# Altium PCB SEC(70x35mm).PcbDoc (part 1 of 2)
Units mil, origin at the board's own origin, x right, y up, seen from the top; angles counter-clockwise.
Board outline 2767.39 x 1392.75 mil, 4 copper layers (Top Layer, GND, POWER, Bottom Layer), stack 25.134 mil thick; 146 components, 106 nets, 504 pads, 259 vias.
Unrouted connection lines stored in the file: 8.
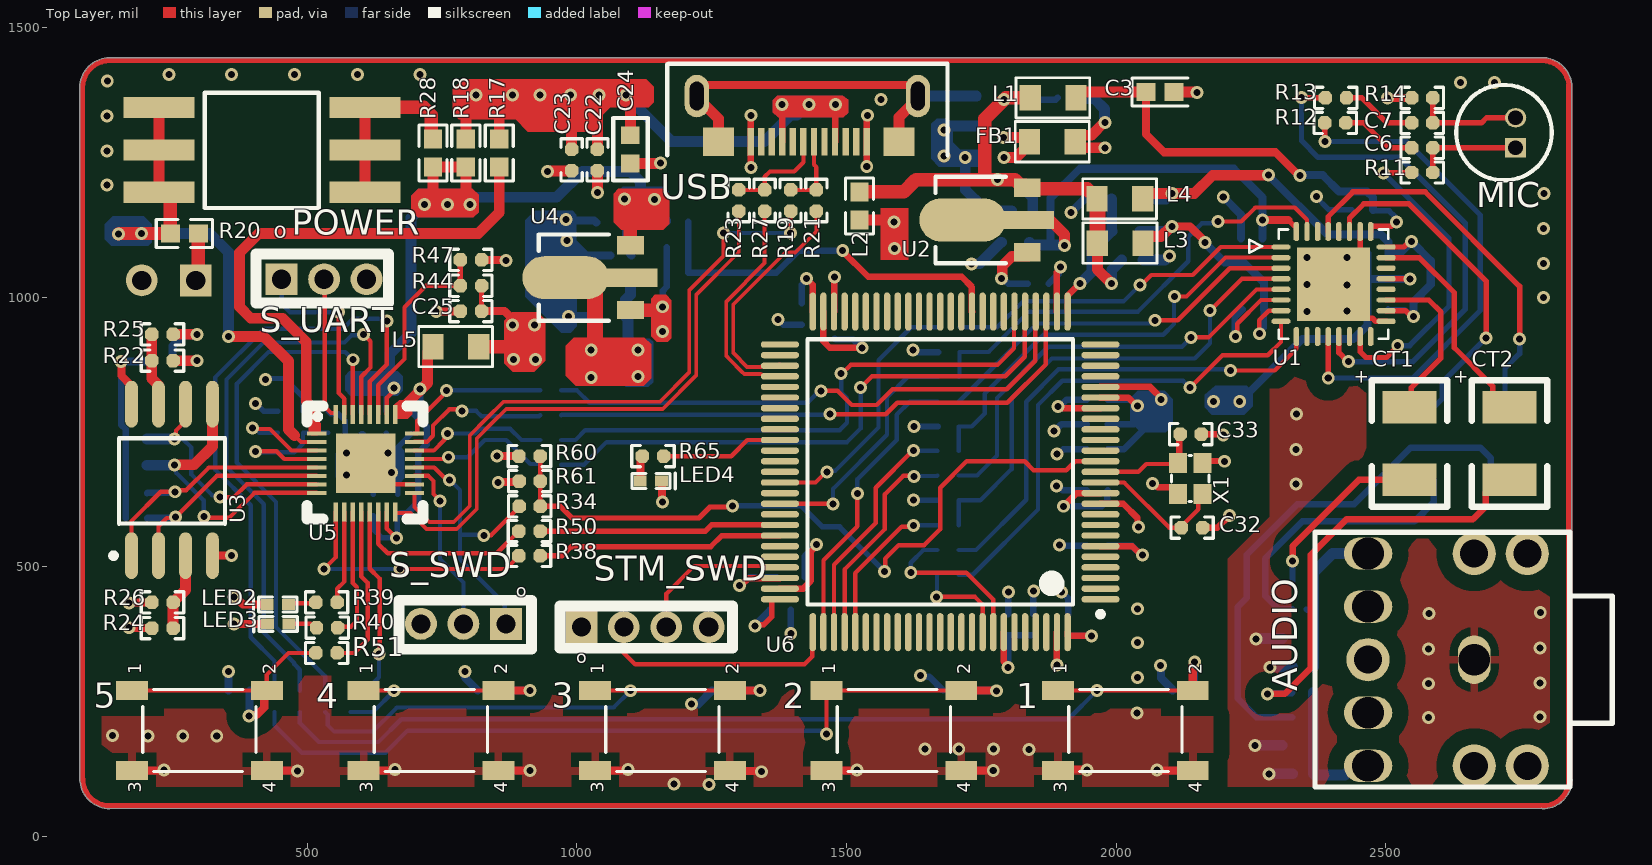
[diagram p0: Top Layer view]
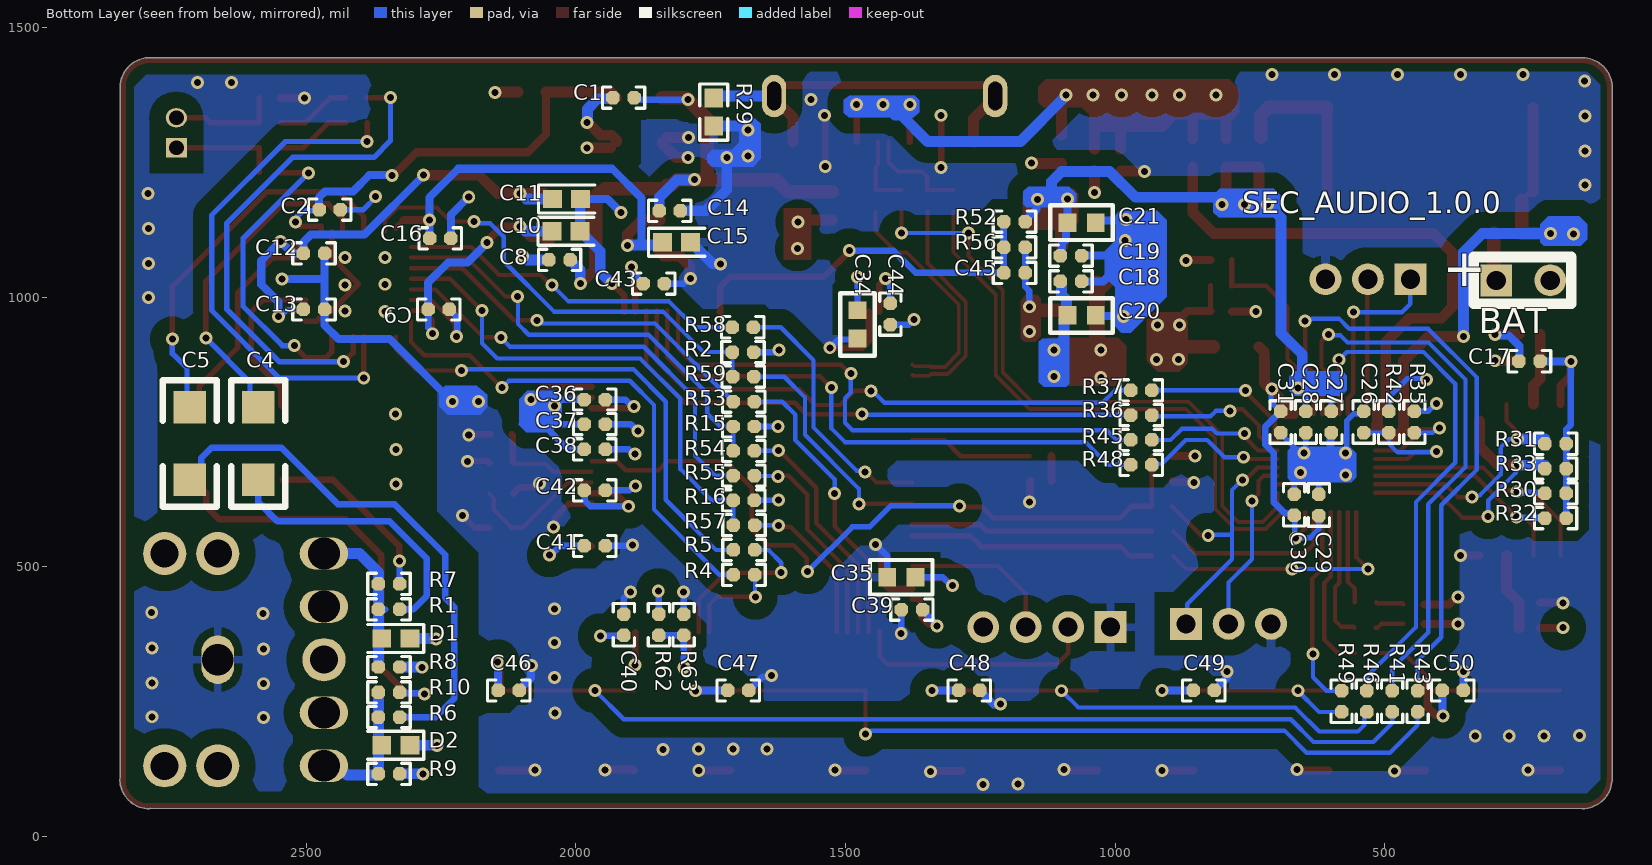
[diagram p1: Bottom Layer view, seen from below]
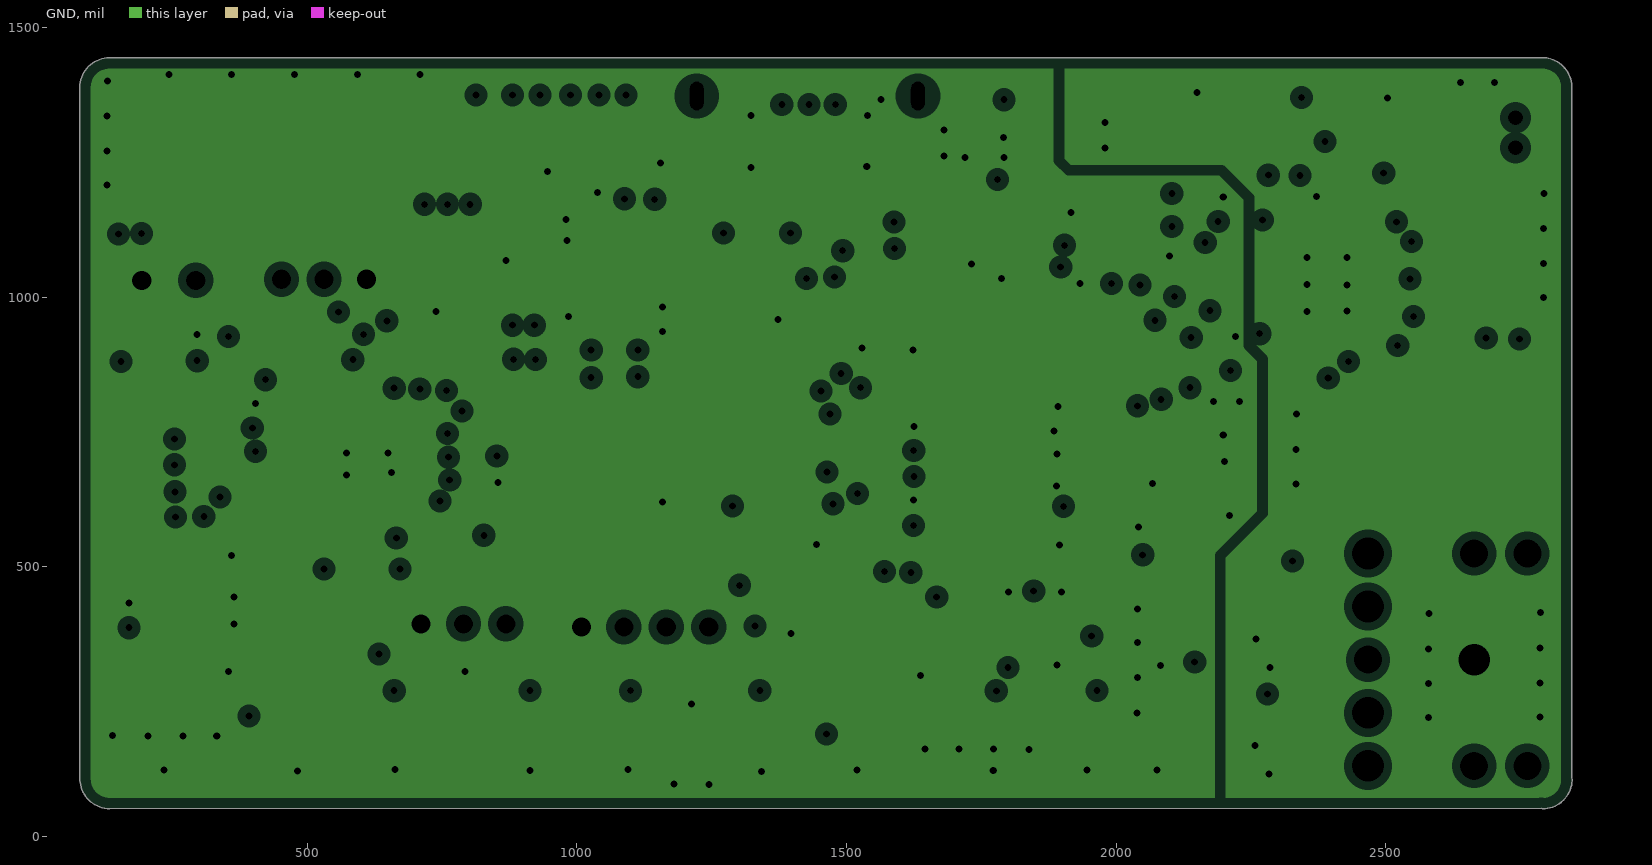
[diagram p2: GND, clearances drawn from the general rule]
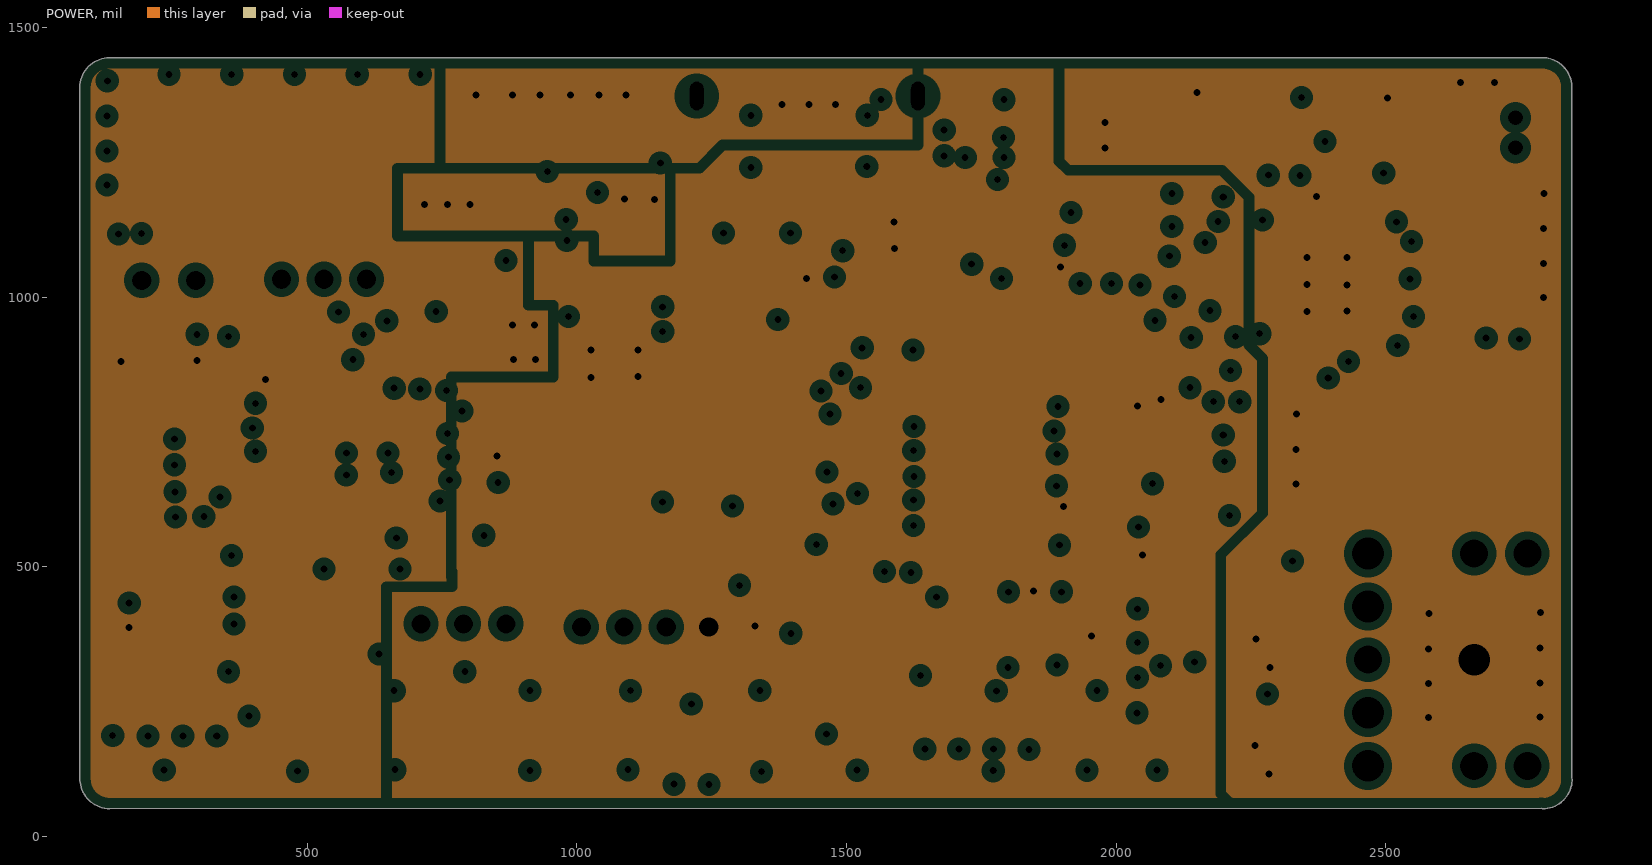
[diagram p3: POWER, clearances drawn from the general rule]

## Layer stack, top to bottom
Top Solder: solder mask 0.4, Solder Resist, Dk 3.5
Top Layer: signal copper 1.4
Dielectric 1: core 4.5, FR-4, Dk 4.5
GND: plane copper 1.417, net (Multiple Nets)
Dielectric2: prepreg 5, FR-4, Dk 4.2
POWER: plane copper 1.417, net (Multiple Nets)
Dielectric3: core 10, FR-4, Dk 4.2
Bottom Layer: signal copper 1.4
Bottom Solder: solder mask 0.4, Solder Resist, Dk 3.5

## Board outline
133.35,51.37 cw(c133.35,106.39) 78.68,100.22 78,102.74 78,1388.74 cw(c133.02,1388.74) 133.02,1443.75 2798.02,1443.75 2801.21,1442.6 cw(c2790.02,1388.74) 2844.57,1395.83 2845.03,1393.74 2845.03,1388.7 2845.03,107.89 2845.39,106.02 cw(c2790.38,106.02) 2845.03,99.7 2844.31,95.15 cw(c2790.38,106.02) 2790.38,51 2787.79,51.72

## Design rules (kind name [scope] priority, off if disabled: settings)
Clearance Clearance_GND_EARTH [InNet('GND_EARTH') vs InNet('GND')] p1: gap=30 ignorepadtopadclearanceinfootprint=FALSE except(0: Arc-Hole Track-Hole SMDPad-Hole THPad-Hole Via-Hole Fill-Hole Poly-Hole Region-Hole Text-Hole)
Clearance Clearance_GND [InPolygon] p2: gap=30 ignorepadtopadclearanceinfootprint=FALSE except(0: Arc-Hole Track-Hole SMDPad-Hole THPad-Hole Via-Hole Fill-Hole Poly-Hole Region-Hole Text-Hole)
Clearance [All] p3: gap=5 ignorepadtopadclearanceinfootprint=FALSE except(0: Arc-Hole Track-Hole SMDPad-Hole THPad-Hole Via-Hole Fill-Hole Poly-Hole Region-Hole Text-Hole)
ComponentClearance [All] p1 off: gap=10 collisioncheckmode=3 verticalgap=10 showdistances=FALSE
DiffPairsRouting "Schematic Differential Pairs Routing_1" [InNetClass('USB_DIFF')] p1: maxlimit=50 minlimit=6 mostfreqgap=6 toplayer_minwidth=7 toplayer_maxwidth=7 toplayer_prefwidth=7 bottomlayer_minwidth=7 bottomlayer_maxwidth=7 bottomlayer_prefwidth=7 maxuncoupledlength=500
DiffPairsRouting DiffPairs_USB [InNetClass('USB_DIFF')] p2: maxlimit=50 minlimit=6 mostfreqgap=6 toplayer_minwidth=7 toplayer_maxwidth=7 toplayer_prefwidth=7 bottomlayer_minwidth=7 bottomlayer_maxwidth=7 bottomlayer_prefwidth=7 maxuncoupledlength=50
DiffPairsRouting DiffPairs_ETHERNET [InDifferentialPair ('ETHER0_D0') Or InDifferentialPair('ETHER0_D1') Or InDifferentialPair ('ETHER0_D2') OR InDifferentialPair ('ETHER0_D3')] p3: maxlimit=50 minlimit=6 mostfreqgap=6 toplayer_minwidth=5.5 toplayer_maxwidth=5.5 toplayer_prefwidth=5.5 bottomlayer_minwidth=5.5 bottomlayer_maxwidth=5.5 bottomlayer_prefwidth=5.5 maxuncoupledlength=50
DiffPairsRouting [All] p4: maxlimit=10 minlimit=10 mostfreqgap=10 toplayer_minwidth=15 toplayer_maxwidth=15 toplayer_prefwidth=15 bottomlayer_minwidth=15 bottomlayer_maxwidth=15 bottomlayer_prefwidth=15 maxuncoupledlength=500
HoleSize [All] p1: absolutevalues=TRUE maxlimit=1000 minlimit=1 maxpercent=80.000 minpercent=20.000
MatchedLengths MatchLengths_xSignals_ETHERNET0 [InxSignalClass('xSignals_ETHERNET0')] p1: tolerance=5 checknetsindiffpair=FALSE checkdiffpairvsdiffpair=TRUE checkxsignals=TRUE checkothers=TRUE
MatchedLengths MatchLengths_xSignals_USB_TX1 [InxSignalClass('xSignals_USB_TX1')] p2: tolerance=2 checknetsindiffpair=FALSE checkdiffpairvsdiffpair=TRUE checkxsignals=TRUE checkothers=TRUE
MatchedLengths MatchLengths_xSignals_USB_RX1 [InxSignalClass('xSignals_USB_RX1')] p3: tolerance=2 checknetsindiffpair=FALSE checkdiffpairvsdiffpair=TRUE checkxsignals=TRUE checkothers=TRUE
MatchedLengths MatchLengths_xSignals_USB_D1 [InxSignalClass('xSignals_USB_D1')] p4: tolerance=5 checknetsindiffpair=FALSE checkdiffpairvsdiffpair=TRUE checkxsignals=TRUE checkothers=TRUE
MatchedLengths MatchLengths_xSignals_nETHERNET1_TX [InxSignalClass('xSignals_nETHERNET1_TX')] p5: tolerance=5 checknetsindiffpair=FALSE checkdiffpairvsdiffpair=TRUE checkxsignals=TRUE checkothers=TRUE
MatchedLengths MatchLengths_xSignals_nETHERNET1_RX [InxSignalClass('xSignals_nETHERNET1_RX')] p6: tolerance=5 checknetsindiffpair=FALSE checkdiffpairvsdiffpair=TRUE checkxsignals=TRUE checkothers=TRUE
MatchedLengths MatchLengths_xSignals_ETHERNET1_TX [InxSignalClass('xSignals_ETHERNET1_TX')] p7: tolerance=5 checknetsindiffpair=FALSE checkdiffpairvsdiffpair=TRUE checkxsignals=TRUE checkothers=TRUE
MatchedLengths MatchLengths_xSignals_ETHERNET1_RX [InxSignalClass('xSignals_ETHERNET1_RX')] p8: tolerance=5 checknetsindiffpair=FALSE checkdiffpairvsdiffpair=TRUE checkxsignals=TRUE checkothers=TRUE
MatchedLengths MatchLengths_xSignals_nETHER0_D3 [InxSignalClass('xSignals_nETHER0_D3')] p9: tolerance=5 checknetsindiffpair=FALSE checkdiffpairvsdiffpair=TRUE checkxsignals=TRUE checkothers=TRUE
MatchedLengths MatchLengths_xSignals_nETHER0_D2 [InxSignalClass('xSignals_nETHER0_D2')] p10: tolerance=5 checknetsindiffpair=FALSE checkdiffpairvsdiffpair=TRUE checkxsignals=TRUE checkothers=TRUE
MatchedLengths MatchLengths_xSignals_nETHER0_D1 [InxSignalClass('xSignals_nETHER0_D1')] p11: tolerance=5 checknetsindiffpair=FALSE checkdiffpairvsdiffpair=TRUE checkxsignals=TRUE checkothers=TRUE
MatchedLengths MatchLengths_xSignals_nETHER0_D0 [InxSignalClass('xSignals_nETHER0_D0')] p12: tolerance=5 checknetsindiffpair=FALSE checkdiffpairvsdiffpair=TRUE checkxsignals=TRUE checkothers=TRUE
MatchedLengths MatchLengths_xSignals_ETHERNET0_D3 [InxSignalClass('xSignals_ETHERNET0_D3')] p13: tolerance=5 checknetsindiffpair=FALSE checkdiffpairvsdiffpair=TRUE checkxsignals=TRUE checkothers=TRUE
MatchedLengths MatchLengths_xSignals_ETHERNET0_D2 [InxSignalClass('xSignals_ETHERNET0_D2')] p14: tolerance=5 checknetsindiffpair=FALSE checkdiffpairvsdiffpair=TRUE checkxsignals=TRUE checkothers=TRUE
MatchedLengths MatchLengths_xSignals_ETHERNET0_D1 [InxSignalClass('xSignals_ETHERNET0_D1')] p15: tolerance=5 checknetsindiffpair=FALSE checkdiffpairvsdiffpair=TRUE checkxsignals=TRUE checkothers=TRUE
MatchedLengths MatchLengths_xSignals_ETHERNET0_D0 [InxSignalClass('xSignals_ETHERNET0_D0')] p16: tolerance=5 checknetsindiffpair=FALSE checkdiffpairvsdiffpair=TRUE checkxsignals=TRUE checkothers=TRUE
MatchedLengths MatchLengths_TF_CARD [InxSignalClass('xSignals_TF_CARD')] p17: tolerance=10 checknetsindiffpair=FALSE checkdiffpairvsdiffpair=TRUE checkxsignals=TRUE checkothers=TRUE
MatchedLengths MatchLengths_xSignals_TF_CARD [InxSignalClass('xSignals_P2_TF_CARD')] p18: tolerance=5 checknetsindiffpair=FALSE checkdiffpairvsdiffpair=TRUE checkxsignals=TRUE checkothers=TRUE
MatchedLengths MatchLengths_xSignals_RGMII_MDIO [InxSignalClass('xSignals_RGMII_MDIO')] p19: tolerance=5 checknetsindiffpair=FALSE checkdiffpairvsdiffpair=TRUE checkxsignals=TRUE checkothers=TRUE
MatchedLengths MatchLengths_xSignals_RGMII_TX [InxSignalClass('xSignals_RGMII_TX')] p20: tolerance=5 checknetsindiffpair=FALSE checkdiffpairvsdiffpair=TRUE checkxsignals=TRUE checkothers=TRUE
MatchedLengths MatchLengths_xSignals_RGMII_RX [InxSignalClass('xSignals_RGMII_RX')] p21: tolerance=5 checknetsindiffpair=FALSE checkdiffpairvsdiffpair=TRUE checkxsignals=TRUE checkothers=TRUE
MatchedLengths MatchedLengths_USB_DiffPairs [InxSignalClass('USB_CHU43_1_DL') OR InxSignalClass('USB_CHU43_1_RX') OR InxSignalClass('USB_CHU43_1_TX')] p22: tolerance=5 checknetsindiffpair=TRUE checkdiffpairvsdiffpair=FALSE checkxsignals=FALSE checkothers=FALSE
MatchedLengths MatchLengths_xSignals_ETHERNET_IN_MD [InxSignalClass('xSignals_ETHERNET_IN_MD')] p23: tolerance=10 checknetsindiffpair=FALSE checkdiffpairvsdiffpair=TRUE checkxsignals=TRUE checkothers=TRUE
MatchedLengths MatchLengths_xSignals_ETHERNET_IN_R [InxSignalClass('xSignals_ETHERNET_IN_R')] p24: tolerance=10 checknetsindiffpair=FALSE checkdiffpairvsdiffpair=TRUE checkxsignals=TRUE checkothers=TRUE
MatchedLengths MatchLengths_xSignals_ETHERNET_IN_T [InxSignalClass('xSignals_ETHERNET_IN_T')] p25: tolerance=10 checknetsindiffpair=FALSE checkdiffpairvsdiffpair=TRUE checkxsignals=TRUE checkothers=TRUE
MatchedLengths MatchLengths_xSignals_ETHERNET_D3 [InxSignalClass('xSignals_ETHERNET_D3')] p26: tolerance=10 checknetsindiffpair=FALSE checkdiffpairvsdiffpair=TRUE checkxsignals=TRUE checkothers=TRUE
MatchedLengths MatchLengths_xSignals_ETHERNET_D2 [InxSignalClass('xSignals_ETHERNET_D2')] p27: tolerance=10 checknetsindiffpair=FALSE checkdiffpairvsdiffpair=TRUE checkxsignals=TRUE checkothers=TRUE
MatchedLengths MatchLengths_xSignals_ETHERNET_D1 [InxSignalClass('xSignals_ETHERNET_D1')] p28: tolerance=10 checknetsindiffpair=FALSE checkdiffpairvsdiffpair=TRUE checkxsignals=TRUE checkothers=TRUE
MatchedLengths MatchLengths_xSignals_ETHERNET_D0 [InxSignalClass('xSignals_ETHERNET_D0')] p29: tolerance=10 checknetsindiffpair=FALSE checkdiffpairvsdiffpair=TRUE checkxsignals=TRUE checkothers=TRUE
MatchedLengths MatchLengths_xSignals_USB3.0_R [InxSignalClass('xSignals_USB3.0_R')] p30: tolerance=10 checknetsindiffpair=FALSE checkdiffpairvsdiffpair=TRUE checkxsignals=TRUE checkothers=TRUE
MatchedLengths MatchLengths_xSignals_USB3.0_T [InxSignalClass('xSignals_USB3.0_T')] p31: tolerance=10 checknetsindiffpair=FALSE checkdiffpairvsdiffpair=TRUE checkxsignals=TRUE checkothers=TRUE
MatchedLengths MatchLengths_xSignals_USB2.0_NP [InxSignalClass('xSignals_USB2.0_NP')] p32: tolerance=10 checknetsindiffpair=FALSE checkdiffpairvsdiffpair=TRUE checkxsignals=TRUE checkothers=TRUE
MinimumSolderMaskSliver [All] p1: minsoldermaskwidth=5
PlaneClearance [All] p1: clearance=15
PlaneConnect [All] p1: planeconnectstyle=Direct reliefexpansion=20 reliefentries=4 reliefconductorwidth=10 reliefairgap=10
PolygonConnect Polygon_GND_GND_EARTH [(InComponent('C86') OR InComponent('C87') OR InComponent('R46'))] p1: connectstyle=Direct reliefconductorwidth=10 reliefentries=4 polygonreliefangle="90 Angle" airgapwidth=10
PolygonConnect VIA [IsVia] p2: connectstyle=Direct reliefconductorwidth=10 reliefentries=4 polygonreliefangle="90 Angle" airgapwidth=10
PolygonConnect Polygon_GND_EARTH [All vs (InNet('GND_EARTH') or InNet('DI_GND') or  InNet('GND_DO'))] p3: connectstyle=Direct reliefconductorwidth=10 reliefentries=4 polygonreliefangle="90 Angle" airgapwidth=10
PolygonConnect Polygon_CPU_HOLE [HasFootprint('CON_SOM_TL5728') vs InNet('GND')] p4: connectstyle=Direct reliefconductorwidth=10 reliefentries=4 polygonreliefangle="90 Angle" airgapwidth=10
PolygonConnect [All] p5: connectstyle=Relief reliefconductorwidth=15 reliefentries=4 polygonreliefangle="90 Angle" airgapwidth=15
RoutingVias [All] p1: holewidth=28 width=50 viastyle="Through Hole" minholewidth=28 minwidth=50 maxholewidth=28 maxwidth=50
SilkToSilkClearance [All] p1: silktosilkclearance=2
SilkToSolderMaskClearance [IsPad] p1: minsilkscreentomaskgap=2 clearancetoexposedcopper=TRUE
SolderMaskExpansion [All] p1: expansion=4 istentingtop=FALSE
Width [All] p1: maxlimit=500 minlimit=5 preferedwidth=20
22 further rules are at their usual default settings.

## Classes and differential pairs
net class USB_DIFF: SEC_DN SEC_DP STM_DN STM_DP
component class SECERT: 1 2 3 4 5 BAT C17 C18 C19 C20 C21 C22 C23 C24 C25 C26 C27 C28 C29 C30 C31 C46 C47 C48 C49 C50 L5 LED2 LED3 POWER R17 R18 R19 R20 R21 R22 R23 R24 R25 R26 R27 R28 R29 R30 R31 R32 R33 R34 R35 R36 R37 R38 R39 R40 R41 R42 R43 R44 R45 R46 R47 R48 R49 R50 R51 S_SWD S_UART U3 U4 U5 USB
component class CPU: C32 C33 C34 C35 C36 C37 C38 C39 C40 C41 C42 C43 C44 C45 LED4 R52 R53 R54 R55 R56 R57 R58 R59 R60 R61 R62 R63 R65 STM_SWD U6 X1
component class AUDIO: AUDIO C1 C2 C3 C4 C5 C6 C7 C8 C9 C10 C11 C12 C13 C14 C15 C16 CT1 CT2 D1 D2 FB1 L1 L2 L3 L4 MIC R1 R2 R4 R5 R6 R7 R8 R9 R10 R11 R12 R13 R14 R15 R16 U1 U2
differential pair STM_D: +STM_DP -STM_DN
differential pair SEC_D: +SEC_DP -SEC_DN

## Components (designator, comment, footprint, x,y, rotation, side; value= is the part's Value field where it differs from the comment)
1 "TS5215A+250GF" button_TS5215A 2056.91,210.47 r90 top
2 "TS5215A+250GF" button_TS5215A 1627.68,210.47 r90 top
3 "TS5215A+250GF" button_TS5215A 1198.45,210.47 r90 top
4 "TS5215A+250GF" button_TS5215A 769.23,210.47 r90 top
5 "TS5215A+250GF" button_TS5215A 340,210.47 r90 top
AUDIO "PJ-307N5" JACK5-472X551-SJ1-3524NG 2663.85,327.57 r180 top locked
BAT "BAT" "HDR1X2 - BAT" 244.18,1133.36 r180 bottom
C1 "0.1uf,16V" 402 1911.32,1370 r0 bottom
C2 "0.1uf,16V" 402 2456.31,1162 r180 bottom
C3 "10uF,6.3V" C0603T 2055,1380.4 r0 top
C4 "47uF,6.3V,1206" 1206 2589,796 r270 bottom
C5 "47uF,6.3V,1206" 1206 2716,796 r270 bottom
C6 "0.1uf,16V" 402 2567.31,1276.89 r0 top
C7 "0.1uf,16V" 402 2567.31,1323 r0 top
C8 "0.1uf,16V" 402 2030,1069 r0 bottom
C9 "0.1uf,16V" 402 2254,977 r180 bottom
C10 "10uF,6.3V" C0603T 2044,1122 r180 bottom
C11 "10uF,6.3V" C0603T 2043,1182 r180 bottom
C12 "0.1uf,16V" 402 2485.31,1081 r180 bottom
C13 "0.1uf,16V" 402 2485.31,977 r180 bottom
C14 "1uF,16V" 402 1825.68,1160 r180 bottom
C15 "4.7uF,6.3V" C0603T 1839,1101.79 r180 bottom
C16 "0.1uf,16V" 402 2251.31,1109 r180 bottom
C17 "0.1uf,16V" 402 231.31,881 r0 bottom
C18 "1uf,16V" 402 1081.68,1029 r180 bottom
C19 "1uf,16V" 402 1081.68,1077 r180 bottom
C20 "2.2uF/10V" 0603A 1153.86,966 r0 bottom
C21 "2.2uF/10V" 0603A 1153.86,1138 r0 bottom
C22 "1uf,16V" 402 1038,1254.32 r270 top
C23 "0.1uf,16V" 402 990,1254.32 r270 top
C24 "2.2uF/10V" 0603A 1099,1365.86 r90 top
C25 "0.1uf,16V" 402 803.31,974 r180 top
C26 "0.1uf,16V" 402 539,768.31 r90 bottom
C27 "0.1uf,16V" 402 599,768.31 r270 bottom
C28 "0.1uf,16V" 402 646,768.31 r270 bottom
C29 "1uf,16V" 402 622,614.31 r90 bottom
C30 "0.1uf,16V" 402 668,614.69 r90 bottom
C31 "0.1uf,16V" 402 693,768.31 r270 bottom
C32 "12pF" 402 2140.69,572.44 r0 top
C33 "12pF" 402 2138.31,746 r0 top
C34 "2.2uF/10V" 0603A 1477.69,857.32 r270 bottom
C35 "2.2uF/10V" 0603A 1488.22,480.43 r0 bottom
C36 "1uf,16V" 402 1965,810 r180 bottom
C37 "0.01uf,16V" 402 1965,764.43 r180 bottom
C38 "0.1uf,16V" 402 1965,717.43 r180 bottom
C39 "0.1uf,16V" 402 1376.69,420.43 r0 bottom
C40 "0.1uf,16V" 402 1910.69,392.31 r90 bottom
C41 "0.1uf,16V" 402 1965,538.43 r180 bottom
C42 "0.1uf,16V" 402 1965,641.43 r180 bottom
C43 "0.1uf,16V" 402 1855.31,1025 r180 bottom
C44 "0.1uf,16V" 402 1416.69,968.43 r270 bottom
C45 "0.1uf,16V" 402 1186.31,1045 r180 bottom
C46 "0.1uf,16V" 402 2124.31,270.47 r180 bottom
C47 "0.1uf,16V" 402 1698.59,270.47 r180 bottom
C48 "0.1uf,16V" 402 1270.31,270.47 r180 bottom
C49 "0.1uf,16V" 402 835.68,270.47 r180 bottom
C50 "0.1uf,16V" 402 373.69,270.47 r180 bottom
CT1 "100uF/10V" 1210C 2543.83,796 r270 top
CT2 "100uF/10V" 1210C 2729,796 r270 top
D1 "PESD0603-240" C0603T 2307.69,367 r0 bottom
D2 "PESD0603-240" C0603T 2307.69,169 r0 bottom
FB1 "150OHM800mA" Ind_0805 1812.78,1250.6 r90 top
L1 "BLM21PG221SN1D" IND_0805 1814.15,1331.9 r90 top
L2 "BLM18PG121SN1D" R0603T 1524,1169 r90 top
L3 "BLM21PG221SN1D" IND_0805 1938.43,1062.6 r90 top
L4 "BLM21PG221SN1D" IND_0805 1937.78,1144.6 r90 top
L5 "BLM21PG221SN1D" IND_0805 706.43,870.6 r90 top
LED2 "GREEN" LED1005X04 445.31,430 r180 top
LED3 "RED" LED1005X04 445.69,394 r180 top
LED4 "LED1, GREEN" LED1005X04 1137.24,658.87 r0 top
MIC "GMI4015P-2C-60DB" MIC_GMI4015P 2719,1305 r90 top
POWER "SWITCH" SWITCH_PS-5850 347,1298 r0 top
R1 "NC, 0" 402 2346.36,421 r0 bottom
R2 "1K" 402 1690,898 r180 bottom
R4 "22,5%" 402 1688,485 r0 bottom
R5 "22,5%" 402 1688,531 r0 bottom
R6 "NC, 0" 402 2346.36,221 r0 bottom
R7 "0" 402 2346.36,468 r0 bottom
R8 "20K,1%" 402 2346.36,314 r180 bottom
R9 "20K,1%" 402 2346.36,116 r180 bottom
R10 "0" 402 2346.36,267 r0 bottom
R11 "1K" 402 2567.31,1231 r0 top
R12 "0" 402 2406.31,1323 r0 top
R13 "0" 402 2407.31,1369.31 r0 top
R14 "1K" 402 2567.31,1369.31 r0 top
R15 "20K,1%" 402 1688.31,760 r180 bottom
R16 "20K,1%" 402 1688.31,623 r180 bottom
R17 "NC,  0" R0603T 856,1267 r270 top
R18 "0" R0603T 794,1267 r270 top
R19 "22" 402 1396,1179 r90 top
R20 "NC,  0" R0603T 272,1118 r0 top
R21 "NC, 22" 402 1444,1179 r90 top
R22 "10K" 402 231.31,882 r0 top
R23 "22" 402 1300,1179 r90 top
R24 "10K" 402 231.31,386 r0 top
R25 "NC, 10K" 402 231.31,931 r0 top
R26 "NC, 10K" 402 231.31,434 r0 top
R27 "NC, 22" 402 1348,1179 r90 top
R28 "NC,  0" R0603T 733,1267 r270 top
R29 "NC, 0" R0603T 1744,1343 r90 bottom
R30 "4.7K" 402 183,636 r0 bottom
R31 "4.7K" 402 183,728 r0 bottom
R32 "4.7K" 402 183,590 r0 bottom
R33 "4.7K" 402 183,682 r0 bottom
R34 "NC, 22" 402 912.31,612 r180 top
R35 "1K" 402 445,768.31 r90 bottom
R36 "22" 402 951.31,781 r180 bottom
R37 "22" 402 951.31,827 r180 bottom
R38 "22" 402 912,520 r180 top
R39 "1K" 402 535.69,434 r0 top
R40 "1K" 402 536.69,387 r0 top
R41 "4.7K" 402 486,250.31 r270 bottom
R42 "10K" 402 492,768.31 r90 bottom
R43 "4.7K" 402 439,250.31 r270 bottom
R44 "10K" 402 803.31,1021 r0 top
R45 "22" 402 951.31,735 r180 bottom
R46 "4.7K" 402 533,250.31 r270 bottom
R47 "NC, 10K" 402 803.31,1069 r0 top
R48 "22" 402 951.31,689 r180 bottom
R49 "4.7K" 402 580,250.31 r270 bottom
R50 "22" 402 912,566 r180 top
R51 "4.7K" 402 535.69,340 r180 top
R52 "10K" 402 1186.31,1140 r180 bottom
R53 "10,5%" 402 1688.31,806 r180 bottom
R54 "10,5%" 402 1688.31,714.6 r180 bottom
R55 "10,5%" 402 1688.31,669 r180 bottom
R56 "10K" 402 1186.31,1092 r0 bottom
R57 "10,5%" 402 1688,577 r180 bottom
R58 "22,5%" 402 1690.31,944 r180 bottom
R59 "22,5%" 402 1689.31,852.4 r180 bottom
R60 "10K" 402 912,705 r180 top
R61 "NC, 10K" 402 912.31,658.74 r180 top
R62 "NC, 10K" 402 1846,392.31 r90 bottom
R63 "10K" 402 1800,392.31 r90 bottom
R65 "1K" 402 1141,705 r180 top
S_SWD "S_SWD" "HDR1X3- 2mm" 828.82,275.89 r180 top
S_UART "S_UART" "HDR1X3- 2mm" 491.63,1151.11 r0 top
STM_SWD "STM_SWD" "HDR1X4- 2mm" 1047.51,506.11 r0 top
U1 "TLV320AIC3104" qfn5x5-32ti-39m 2403,1024 r180 top locked
U2 "AMS1117-1.8" SOT-89 1835,1083 r90 top locked
U3 "BL25CM2A_PARC" "R-8_N _W" 249,615 r90 top
U4 "AMS1117-3.3" SOT-89 1099,976 r90 top locked
U5 "SEC" SMD_32 529.26,613.26 r0 top
U6 "STM32H750VBT6" STM-LQFP100_N 1673.52,675.86 r180 top locked
USB "USB_TYPEC" USB-GT 1432.2,1257.74 r180 top locked
X1 "32MHz" BT-XTAL_2016 2137.27,663.54 r270 top

## Footprints (in the part's own frame and the unit in brackets; to place one, negate y for a bottom-side part, rotate by r counter-clockwise, add the part's x,y. Pads: shape width x height; smd on the part's side, far side on the other; paste and mask are expansions set on the pad)
402 [mil] "C0402"
  oct 25x25 smd: 1(-19.69,0) 2(19.69,0)
  silkscreen extent -39,-20 39,20
0603A [mil]
  rect 33x34 smd: 1(-118.11,0) 2(-65.86,0)
  silkscreen extent -150,-32 -34,32
1206 [mil]
  rect 60x60 smd: 1(0,0) 2(135,0)
  silkscreen extent -50,-50 185,50
1210C [mil]
  rect 60x100 smd: 1(0,0) 2(135,0)
  silkscreen extent -50,-70 185,70
BT-XTAL_2016 [mm] "Crystal 2.0 x 1.6 mm"
  rect 0.95x0.85 smd: 1(-0.725,-0.575) 2(0.725,-0.575) 3(0.725,0.575) 4(-0.725,0.575)
  silkscreen extent -1.08,-0.88 1.08,0.88, body extent -1.05,-0.85 1.05,0.85, height 0.56
button_TS5215A [mm] "BUTTON_SW_SMD_4P_SMALL"
  rect 0.9x1.5 smd: 1(1.524,4.191) 2(1.524,-2.159) 3(-2.247,4.189) 4(-2.247,-2.159)
  silkscreen extent -2.29,-1.65 1.57,3.68
C0603T [mil]
  rect 35x34 smd: 1(0,0) 2(52,0)
  silkscreen extent -26,-26 78,26
"HDR1X2 - BAT" [mm] "Connector; Header; 5 Position; Right Angle"
  rect 1.5x1.5 hole 0.9: 1(-1.24,-2.6)
  round 1.5 hole 0.9: 2(1.3,-2.6)
  silkscreen extent -2.3,-3.7 2.29,-1.5
"HDR1X3- 2mm" [mm] "Connector; Header; 5 Position; Right Angle"
  rect 1.5x1.5 hole 0.9: 1(-1,-3)
  round 1.5 hole 0.9: 2(1,-3) 3(3,-3)
  silkscreen extent -2.21,-4.11 4.04,-1.8
"HDR1X4- 2mm" [mm] "Connector; Header; 5 Position; Right Angle"
  rect 1.5x1.5 hole 0.9: 1(-1,-3)
  round 1.5 hole 0.9: 2(1,-3) 3(3,-3) 4(5,-3)
  silkscreen extent -2,-4 6.12,-2
Ind_0805 [mm]
  rect 1.2x1 smd: 1(0.95,-0.675) 2(0.95,-2.825)
  silkscreen extent 0,-3.48 1.91,0
IND_0805 [mm]
  rect 1.2x1 smd: 1(0.95,-0.675) 2(0.95,-2.825)
  silkscreen extent 0,-3.48 1.91,0
JACK5-472X551-SJ1-3524NG [mil] "JACK5-472X551-SJ1-3524NG"
  oval 60x90 hole 59: 1(0,0)
  oval 90x60 / inner round 60 / far side oval 90x60 hole 59: 2(196.85,-196.85) 3(196.85,196.85) 4(196.85,-98.43)
  oval 90x60 hole 59: 5(196.85,98.43)
  round 80 hole 52: " "(-98.43,196.85) " "(-98.43,-196.85) " "(0,196.85) " "(0,-196.85) " "(196.85,0)
  silkscreen extent -256,-236 295,236, body extent -256,-236 295,236, height 150
LED1005X04 [mm] "Chip Capacitor, 2-Leads, Body 1.0x0.5mm, IPC High Density"
  rect 0.6x0.5 smd: 1(-0.5,0) 2(0.5,0)
  silkscreen extent -0.9,-0.38 1.14,0.38, body extent -0.51,-0.25 0.51,0.25, height 0.5
MIC_GMI4015P [mm]
  rect 0.9x1 hole 0.7: 1(-0.714,-0.547)
  oval 0.9x1 hole 0.7: 2(0.7,-0.55)
  silkscreen extent -2.25,-2.25 2.25,2.25
qfn5x5-32ti-39m [mil] "QFN5X5-32TI-39M"
  oct 35x10 smd: 1(97.44,-68.9) 2(97.44,-49.21) 3(97.44,-29.53) 4(97.44,-9.84) 5(97.44,9.84) 6(97.44,29.53) 7(97.44,49.21) 8(97.44,68.9) 17(-97.44,68.9) 18(-97.44,49.21) 19(-97.44,29.53) 20(-97.44,9.84) 21(-97.44,-9.84) 22(-97.44,-29.53) 23(-97.44,-49.21) 24(-97.44,-68.9)
  oct 10x35 smd: 9(68.9,97.44) 10(49.21,97.44) 11(29.53,97.44) 12(9.84,97.44) 13(-9.84,97.44) 14(-29.53,97.44) 15(-49.21,97.44) 16(-68.9,97.44) 25(-68.9,-97.44) 26(-49.21,-97.44) 27(-29.53,-97.44) 28(-9.84,-97.44) 29(9.84,-97.44) 30(29.53,-97.44) 31(49.21,-97.44) 32(68.9,-97.44)
  rect 135.83x135.83 smd: 33(0,0)
  silkscreen extent -101,-101 156,101
R0603T [mil]
  rect 35x34 smd: 1(-26,0) 2(26,0)
  silkscreen extent -52,-26 52,26
"R-8_N _W" [mm] "SOIC, 8-Leads, Body 4.9x3.9mm, Pitch 1.27mm, IPC Medium Density"
  oval 2.2x0.6 smd: 1(-2.4,1.905) 2(-2.4,0.635) 3(-2.4,-0.635) 4(-2.4,-1.905) 5(4.737,-1.905) 6(4.737,-0.635) 7(4.737,0.635) 8(4.737,1.905)
  silkscreen extent -2.52,-2.5 3.12,2.88
SMD_32 [mm]
  rect 0.9x0.2 smd: 1(-0.3,3.4) 2(-0.3,3) 3(-0.3,2.6) 4(-0.3,2.2) 5(-0.3,1.8) 6(-0.3,1.4) 7(-0.3,1) 8(-0.3,0.6) 17(4.3,0.6) 18(4.3,1) 19(4.3,1.4) 20(4.3,1.8) 21(4.3,2.2) 22(4.3,2.6) 23(4.3,3) 24(4.3,3.4)
  rect 0.2x0.9 smd: 9(0.6,-0.3) 10(1,-0.3) 11(1.4,-0.3) 12(1.8,-0.3) 13(2.2,-0.3) 14(2.6,-0.3) 15(3,-0.3) 16(3.4,-0.3) 25(3.4,4.3) 26(3,4.3) 27(2.6,4.3) 28(2.2,4.3) 29(1.8,4.3) 30(1.4,4.3) 31(1,4.3) 32(0.6,4.3)
  rect 2.8x2.8 smd: 33(2,2)
  silkscreen extent -0.76,-0.64 4.7,4.7
SOT-89 [mil]
  rect 34x50 smd: 1(0,0) 3(120,0)
  oval 80x160 smd: 2(60,120)
  rect 34x100 smd: 2(60,0)
  silkscreen extent -20,40 140,170
STM-LQFP100_N [mm] "Thin QFP, 100-Leads, Body 14x14mm, Pitch 0.5mm, IPC Medium Density"
  oval 1.8x0.3 smd: 1(-7.55,6) 2(-7.55,5.5) 3(-7.55,5) 4(-7.55,4.5) 5(-7.55,4) 6(-7.55,3.5) 7(-7.55,3) 8(-7.55,2.5) 9(-7.55,2) 10(-7.55,1.5) 11(-7.55,1) 12(-7.55,0.5) 13(-7.55,0) 14(-7.55,-0.5) 15(-7.55,-1) 16(-7.55,-1.5) 17(-7.55,-2) 18(-7.55,-2.5) 19(-7.55,-3) 20(-7.55,-3.5) 21(-7.55,-4) 22(-7.55,-4.5) 23(-7.55,-5) 24(-7.55,-5.5) 25(-7.55,-6) 51(7.55,-6) 52(7.55,-5.5) 53(7.55,-5) 54(7.55,-4.5) 55(7.55,-4) 56(7.55,-3.5) 57(7.55,-3) 58(7.55,-2.5) 59(7.55,-2) 60(7.55,-1.5) 61(7.55,-1) 62(7.55,-0.5) 63(7.55,0) 64(7.55,0.5) 65(7.55,1) 66(7.55,1.5) 67(7.55,2) 68(7.55,2.5) 69(7.55,3) 70(7.55,3.5) 71(7.55,4) 72(7.55,4.5) 73(7.55,5) 74(7.55,5.5) 75(7.55,6)
  oval 0.3x1.8 smd: 26(-6,-7.55) 27(-5.5,-7.55) 28(-5,-7.55) 29(-4.5,-7.55) 30(-4,-7.55) 31(-3.5,-7.55) 32(-3,-7.55) 33(-2.5,-7.55) 34(-2,-7.55) 35(-1.5,-7.55) 36(-1,-7.55) 37(-0.5,-7.55) 38(0,-7.55) 39(0.5,-7.55) 40(1,-7.55) 41(1.5,-7.55) 42(2,-7.55) 43(2.5,-7.55) 44(3,-7.55) 45(3.5,-7.55) 46(4,-7.55) 47(4.5,-7.55) 48(5,-7.55) 49(5.5,-7.55) 50(6,-7.55) 76(6,7.55) 77(5.5,7.55) 78(5,7.55) 79(4.5,7.55) 80(4,7.55) 81(3.5,7.55) 82(3,7.55) 83(2.5,7.55) 84(2,7.55) 85(1.5,7.55) 86(1,7.55) 87(0.5,7.55) 88(0,7.55) 89(-0.5,7.55) 90(-1,7.55) 91(-1.5,7.55) 92(-2,7.55) 93(-2.5,7.55) 94(-3,7.55) 95(-3.5,7.55) 96(-4,7.55) 97(-4.5,7.55) 98(-5,7.55) 99(-5.5,7.55) 100(-6,7.55)
  silkscreen extent -7.68,-6.25 6.25,6.82, body extent -7,-7 7,7, height 1.6
SWITCH_PS-5850 [mm]
  rect 3.35x1 smd: 1(-3.1,1.363) 2(-3.1,-2.637) 2(-3.1,-0.637) 3(6.604,1.363) 4(6.604,-2.637) 4(6.604,-0.637)
  silkscreen extent -0.94,-3.38 4.42,2.06
USB-GT [mm] "USB GT TYPE C"
  rect 1.45x1.35 smd: 1(-4.191,-0.762) 2(4.318,-0.762)
  oval 1.143x2 hole 0.65 slot 1.35 at 90 deg: 3(-5.08,-2.921) 4(5.334,-2.921)
  rect 0.3x1.3 smd: A1(2.794,-0.762) A2(2.298,-0.762) A3(1.801,-0.762) A4(1.305,-0.762) A5(0.808,-0.762) A6(0.312,-0.762) A7(-0.185,-0.762) A8(-0.681,-0.762) A9(-1.178,-0.762) A12(-2.667,-0.762) B10(-2.171,-0.762) B11(-1.674,-0.762)
  silkscreen extent -6.48,-4.45 6.73,-0.13

## Part data
1 2 3 4 5 POWER: library part "SW PUSHBUTTON-SPST SHIELD_0", Remark="ËÄ½ÅÌùÆ¬·½ÐÎ¸´Î»°´¼ü£¨ºìÉ«µã£© ³¤8.5mm"
AUDIO: library part CONN_STEREO_3.5MM_1SW
BAT: library part MHDR1X2, "Header, 2-Pin", LatestRevisionDate=17-Jul-2002, LatestRevisionNote="Re-released for DXP Platform.", Publisher="Altium Limited"
C1 C2 C17 C18 C19 C22 C23 C25 C26 C27 C28 C29 C30 C31 C32 C33 C36 C37 C38 C39 C40 C41 C42 C43 C44 C45 C46 C47 C48 C49 C50: library part "CAP_0.1uF_X7R_16V_10% 0402 _Dup1", Desc="Capacitor 0.01uF 16V 10% 0402"
C3 C10 C11: library part CAP_10uF_X5R_6.3V_20%_0603, Part Number=CAP_10uF_Y5V_10V_10%_0805, Desc="CAP CER 10UF 10V Y5V 0805"
C4 C5: library part CAP_47uF_X5R_6.3V_20%_1206, Part Number=CAP_10uF_Y5V_10V_10%_0805, Desc="CAP CER 4.7UF 6.3V X5R 0603"
C6 C7 C8 C9 C12 C13 C16: library part "CAP_0.1uF_X7R_16V_10% 0402", Desc="Capacitor 0.01uF 16V 10% 0402"
C14: library part CAP_1.0UF_X5R_4V_20%_0201, Part Number=CAP_1.0uF_X5R_10V_10%_0402, Desc="CAP, CER, X7R, 0402, 50V, 10%, 0.1uF"
C15: library part CAP_4.7uF_X5R_6.3V_20%_0402, Part Number=CAP_4.7uF_X5R_6.3V_10%_0603, Desc="CAP CER 4.7UF 6.3V X5R 0603"
C20 C21 C24 C34 C35: library part CAP104
CT1 CT2: library part ECAP, "Electrolytic Capacitor"
D1 D2: library part PROT_PESD0603_240
FB1: library part FERRITE_180_800_0805, "Ferrite Bead 150 Ohm 800mA", Mfr=Steward, MfrNum=LI0805H151R-10, Part Number=FER_180_200_0805, PartName=FerriteBead150ohm800mA, TIIntPartnumber=1L0010, Vendor=Digikey
L1 L2 L3 L4 L5: library part FERRITE_220_0805
LED2 LED3 LED4: library part LED3, "Typical BLUE SiC LED", DatasheetVersion=16-Apr-2002, LatestRevisionDate=17-Dec-2003, LatestRevisionNote="PCB Footprint replaced.", PackageDescription="SM LED; 2 C-Bend Leads; Body 3.5 x 2.8 x 1.9 mm, inc leads (LxWxH typ)", PackageReference=3.5X2.8X1.9, PackageVersion=16-Apr-2002, Published=8-Jun-2000, Publisher="Altium Limited"
MIC: library part Mic2, "Microphone", LatestRevisionDate=17-Jul-2002, LatestRevisionNote="Re-released for DXP Platform.", PackageReference=PIN2, Published=24-Mar-1999, Publisher="Altium Limited"
R1 R2 R4 R5 R6 R7 R10 R12 R13 R17 R18 R19 R20 R21 R22 R23 R24 R25 R26 R27 R28 R29 R30 R31 R32 R33 R34 R35 R36 R37 R38 R39 R40 R41 R42 R43 R44 R45 R46 R47 R48 R49 R50 R51 R52 R56 R58 R59 R60 R61 R62 R63 R65: library part RES_22_1/16W_5%_0402, "RES 22.6K OHM 1/16W 1% SMD 0402", Part Number=RES_22.2K_1/16W_1%_0402
R8 R9 R15 R16: library part RES_20K_1/16W_1%_0402, "RES 2.2K OHM 1/16W 1% SMD 0402", Part Number=RES_2.2K_1/16W_1%_0402
R11 R14: library part RES_22_1/16W_5%_0402, Part Number=RES_22.2K_1/16W_1%_0402
R53 R54 R55 R57: library part RES_10_1/10W_5%_0402, "RES 100 OHM 1/10W 5% 0402 SMD", Part Number=RES_100_1/10W_5%_0402
S_SWD S_UART: library part "Header 3", "Header, 3-Pin", LatestRevisionDate=17-Jul-2002, LatestRevisionNote="Re-released for DXP Platform.", Publisher="Altium Limited"
STM_SWD: library part "Header 4", "Header, 4-Pin", LatestRevisionDate=17-Jul-2002, LatestRevisionNote="Re-released for DXP Platform.", Publisher="Altium Limited"
U1: library part IC_TLV320AIC3104_5, "Low power stereo audio codec", Mfr=TI, MfrNum=TLV320AIC3106IRG, PartName=TLV320AIC3106, TIIntPartnumber=1A0240, Cost10K=0.87, Cost100=2.11, Descriptive_Text="Low power stereo audio codec", DescriptiveText="Low power stereo audio codec", Vendor=Digikey
U2 U4: library part REG1117-3.3, "3-Terminal Positive Voltage Regulator"
U3: library part 75LBC184
U5: library part MH1788
U6: library part STM32F407VGT6, "ARM Cortex-M7", I/Os (High Current)=82, Manufacturer=STMicroelectronics, Operating Frequency(F) (Processor speed) (MHz)=168, Supplier Part Number 1=497-11605-ND, Supply Voltage(Vcc) max (V)=3.6, Supply Voltage(Vcc) min (V)=1.8, ComponentLink1Description="Manufacturer URL", ComponentLink1URL=http://www.st.com/web/en/home.html, ComponentLink2Description=Datasheet, ComponentLink2URL=http://www.st.com/st-web-ui/static/active/en/resource/technical/document/datasheet/DM00037051.pdf, ComponentLink3Description="Package Specification", ComponentLink3URL=http://www.st.com/st-web-ui/static/active/en/resource/technical/document/data_brief/DM00071938.pdf, Core="ARM Cortex-M4", D/A Converter=2x12-bit, DatasheetVersion="Rev. 4", FLASH Size (Prog) (kB)=1024, Internal RAM Size (kB)=192, Mounting Technology="Surface Mount", PackageDescription="100-Pin Low Profile Quad Flat Package, 14 x 14 mm Body, 0.5 mm Pitch", PackageReference=LQFP100, PackageVersion="Rev. 1, 06/2013", Packing=Tray, PartNumber=STM32F407VGT6, Supplier 1=Digi-Key, Supplier 2=Farnell, Supplier 3=Newark, Supplier 4=Mouser, Supplier Part Number 2=2064368, Supplier Part Number 3=73T2333, Supplier Part Number 4=511-STM32F407VGT6
USB: library part USB_GT
X1: library part XTAL_SMD2016_32MHz_8pF_General, "XTAL SMD 2016, 32MHz, Cl=8pF, Total Tol: ±40ppm", Footprint Doc=XTAL_2016, LatestRevisionDate=2016-08-19, Part Number=XTAL_SMD2016_32MHz_8pF_General, Pin Count=4, Published=2016-08-19, Publisher="Nordic Semiconductor"

## Via types
v1: diameter 24, hole 13, Top Layer to Bottom Layer, 259 vias

## Nets (pads, with @x,y where several pads share a name; then routed paths per layer and width w, separated by ;. In a path a pad name is that pad's centre, name@x,y a point inside that pad or via, vN(x,y) a via of type N, cw(c..) or ccw(c..) an arc to the next point about the centre after c; other vN are vias at no path point)
3V3_M: C17.1 C25.1 L5.2 R22.2 R24.1 R30.1 R31.1 R32.1 R33.1 R42.2 R44.2 U3.8 | length 827.6
  Top Layer w10: C25.1@823,974 R44.2@823,1021
  Top Layer w15: v1@155,876 155,854.32 174,835.32 U3.8@174,801.49 ; v1@169.59,384 171.59,386 R24.1@211.62,386 ; C25.1@823,974 865.61,974 887.61,952 894.62,952
  Top Layer w20: R22.2@251,882 v1(295.72,881.96)
  Top Layer w25: L5.2@817.65,908 886.2,908
  Bottom Layer w10: v1@423,849 458,849 492,815 R42.2@492,788
  Bottom Layer w12: v1(154.59,880.38) 154.59,763.41 163.31,754.69 R31.1@163.31,728 R33.1@163.31,682 R30.1@163.31,636 R32.1@163.31,590
  Bottom Layer w15: v1(154.59,880.38) 154.9,880.69 211.31,880.69 C17.1@211.62,881
  other v1: 169.18,386.81 422.59,846.81 923.16,883.96 882.38,884.67 880.59,947.81 920.86,947.81
AIC_AVDD_DAC3.3: C2.1 C3.1 L1.2 U1.25 | length 819.2
  Top Layer w10: U1.25@2471.9,1121.44 2471.9,1131.44 2510.44,1131.44 v1@2516,1137
  Top Layer w15: C3.1@2055,1380.4 2055,1302 2088.5,1268.5 2295.5,1268.5 v1@2338,1226
  Top Layer w20: L1.2@1925.37,1369.31 1925.37,1370.72 1935.05,1380.4 C3.1@2055,1380.4
  Bottom Layer w10: C2.1@2476,1162 2478,1160 2506,1160 2516.83,1149.17 2516.83,1142.2 v1(2519.5,1139.52)
  Bottom Layer w15: v1@2338,1226 2383,1226 2413,1196 2465,1196 2476,1185 C2.1@2476,1162
  other v1: 2340.5,1225.52
AIC_BCLK: R15.1 R54.1 U1.2 | length 823.7
  Top Layer w8: v1(2108,1001) 2130.3,1001 2202.51,1073.21 U1.2@2305.56,1073.21
  Bottom Layer w8: R54.1@1708,714.6 R15.1@1708,760 1732,760 1756,784 1756,821 1865,930 2087,930 2107,950 2107,1000 v1(2108,1001)
AIC_DIN: R16.1 R57.1 U1.4 | length 925.6
  Top Layer w8: v1(2174,974.79) 2233.05,1033.84 U1.4@2305.56,1033.84
  Bottom Layer w8: R57.1@1707.69,577 1707.84,577.16 1707.84,622.84 R16.1@1708,623 1748,623 1806,681 1806,811.4 1880.6,886 2145.48,886 2174,914.52 v1(2174,974.79)
AIC_DOUT: R55.1 U1.5 | length 800.4
  Top Layer w8: v1(2139,925.22) 2171.22,925.22 2260.16,1014.16 U1.5@2305.56,1014.16
  Bottom Layer w8: R55.1@1708,669 1742,669 1779,706 1779,813 1874,908 2121.83,908 v1@2137,923.17
AIC_DRVDD3.3: C11.1 C12.1 C13.1 L4.2 U1.18 U1.24 | length 976.6
  Top Layer w10: U1.18@2500.44,974.79 2536.42,974.79 2547.21,964 v1(2551,964) ; U1.24@2500.44,1092.9 2533.68,1092.9 2543.83,1103.05 v1(2547.62,1103.05)
  Top Layer w20: L4.2@2049,1182 2049,1182.31 2058.69,1192 v1(2103,1192) 2144.82,1192 2178.82,1226 v1(2282,1226)
  Bottom Layer w10: C13.1@2504,978 C13.1@2505,977 2534.21,977 2547.21,964 v1(2551,964)
  Bottom Layer w15: v1(2282,1226) 2392,1116 2490.77,1116 2504.69,1102.09 C12.1@2504.69,1078 ; C12.1@2505,1081 2525.57,1081 v1(2547.62,1103.05) 2583.3,1067.37 2583.3,1023.3 2551,991 v1(2551,964)
  Bottom Layer w20: C11.1@2043,1182 2091.92,1182
AIC_DVDD: C15.1 C16.1 U1.32 U2.2 | length 827.9
  Top Layer w10: 2319,1143 U1.32@2334.05,1127.95
  Top Layer w15: v1(2271,1143) 2319,1143
  Top Layer w20: U2.2@1844,1142.79 1877,1142.79 1904,1115.79 v1(1904,1096)
  Bottom Layer w15: 1878.1,1096.77 1878.1,1183.66 1932.44,1238 2218,1238 2271,1185 v1(2271,1143) C16.1@2271,1109
  Bottom Layer w20: C15.1@1839,1101.79 1844.02,1096.77 1878.1,1096.77 1903.23,1096.77 v1(1904,1096)
AIC_I2C_SCL: R4.1 U6.92 | length 184
  Top Layer w8: v1(1667,444) 1738.2,444 1752.26,429.94 U6.92@1752.26,378.62
  Bottom Layer w8: v1(1667,444) 1667.66,444.66 1667.66,484.34 R4.1@1668.31,485
AIC_I2C_SDA: R5.1 U6.93 | length 311.6
  Top Layer w8: v1(1619,489) 1722,489 1771.95,439.05 U6.93@1771.95,378.62
  Bottom Layer w8: v1(1619,489) 1619,507.41 1642.4,530.81 1668.12,530.81 R5.1@1668.31,531
AIC_IOVDD3.3: C9.1 C10.1 L3.2 U1.7 | length 512.8
  Top Layer w8: v1(2266,932) 2265,933 2265,957 2282.79,974.79 U1.7@2305.56,974.79
  Top Layer w15: v1(2103,1131) 2137,1131 2164.95,1103.05 v1(2164.95,1101.3)
  Top Layer w20: L3.2@2049.65,1100 2049.65,1102.55 2059.33,1112.23 2083.15,1112.23 2101.92,1131 v1(2103,1131)
  Bottom Layer w12: v1(2266,932) 2266,935.25 2273.69,942.94 C9.1@2273.69,977
  Bottom Layer w15: v1@2163.73,1101.27 2201,1064 2236.45,1064 2273.69,1026.76 C9.1@2273.69,977
  Bottom Layer w20: C10.1@2044,1122 2093.29,1122 v1@2099.29,1128
AIC_MCLK: R58.1 U1.1 | length 657.2
  Top Layer w8: v1(2044,1022.46) 2046.51,1022.46 2065.06,1041 2142,1041 2193.9,1092.9 U1.1@2305.56,1092.9
  Bottom Layer w8: R58.1@1710,944 1779,944 1827,992 2013.54,992 v1(2044,1022.46)
AIC_RSTOUTn: R2.1 R59.1 U1.31 | length 858.8
  Top Layer w8: v1(2189,1140) 2232,1140 2258,1166 2331,1166 2353.79,1143.21 U1.31@2353.79,1121.44
  Bottom Layer w8: R59.1@1709,852.4 1709.34,852.74 1709.34,897.66 R2.1@1709.69,898 1763.38,898 1838.38,973 2040.3,973 2133.65,1066.35 2133.65,1111.77 2158.81,1136.94 2185.94,1136.94 v1(2189,1140)
AIC_WCLK: R53.1 U1.3 | length 700.1
  Top Layer w8: v1(2072,957) 2114,957 2210.53,1053.53 U1.3@2305.56,1053.53
  Bottom Layer w8: R53.1@1708,806 1853,951 2061.67,951 2067.67,957 v1(2072,957)
AUDIO_L: C4.1 U1.27 | length 622.8
  Top Layer w10: U1.27@2432.53,1121.44 2432.53,1146.53 2459,1173 2542.79,1173 2686,1029.79 v1(2686,924)
  Bottom Layer w10: C4.1@2589,796 2604,811 2604,842 v1(2686,924)
AUDIO_R: C5.1 U1.29 | length 711.5
  Top Layer w10: U1.29@2393.16,1121.44 2393.16,1149.47 2438.69,1195 2573,1195 2748,1020 v1(2748,922)
  Bottom Layer w10: C5.1@2716,796 2721,801 2721,868 2748,895 v1(2748,922)
BAT_VOLTAGE: C45.1 R52.1 R56.2 U6.35 | length 712.7
  Top Layer w12: v1(1492.83,1086) 1492.83,1084.65 1540.03,1037.45 1713.55,1037.45 1732.49,1018.51 1732.49,973.2 U6.35@1732.58,973.1
  Bottom Layer w12: R52.1@1206,1140 R56.2@1206,1092 C45.1@1206,1045 1369.7,1045 1410.7,1086 v1(1492.83,1086)
BOOT0: R62.1 R63.1 U6.94 | length 174.7
  Top Layer w12: U6.94@1791.63,378.62 1791.63,324.19 1799.57,316.25 v1(1799.57,313)
  Bottom Layer w12: v1(1799.57,313) 1799.79,313.21 1799.79,372.41 R63.1@1800,372.62 R62.1@1846,372.62
C_SPI0_CSN: R30.2 U3.1 U5.5 | length 502.1
  Top Layer w8: U3.1@174,520.51 174,584.69 228.27,638.96 v1(254.72,638.96) 257.76,642 275.32,642 317.44,684.13 U5.5@517.45,684.13
  Bottom Layer w12: R30.2@202.69,636 204.17,637.48 253.24,637.48 v1(254.72,638.96)
C_SPI0_MISO: R32.2 U3.2 U5.6 | length 437.6
  Top Layer w8: U3.2@224,520.51 224,575 239.37,590.37 254.14,590.37 v1(255.72,591.96) ; v1@257.76,594 332.14,668.38 U5.6@517.45,668.38
  Bottom Layer w12: R32.2@202.69,590 203.67,590.98 254.74,590.98 v1(255.72,591.96)
C_SPI0_MOSI: R33.2 U3.5 U5.8 | length 530.3
  Top Layer w8: v1(308,593) 310.04,590.96 355.9,590.96 401.83,636.88 U5.8@517.45,636.88
  Top Layer w20: v1(253.45,688.96) 289.96,688.96 324,723 U3.5@324,769.99
  Bottom Layer w8: v1(253.45,688.96) 256.51,685.9 256.51,674.49 308,623 v1(308,593)
  Bottom Layer w20: R33.2@202.69,688 v1@253.45,688
C_SPI0_SCK: R31.2 U3.6 U5.7 | length 471.6
  Top Layer w8: v1(253.45,736.96) 256.51,740.02 256.51,752.5 274,769.99 U3.6@274,801.49 ; v1(338,629) 364,629 387.63,652.63 U5.7@517.45,652.63
  Bottom Layer w8: v1(253.45,736.96) 269.04,736.96 285,721 285,671 323.94,632.06 334.94,632.06 v1(338,629)
  Bottom Layer w20: R31.2@202.69,737 v1(253.45,736.96)
C_SPI1_CSN: R36.1 U6.28 | length 1038.2
  Top Layer w8: v1(1469,783) 1469.45,782.55 1572.55,782.55 1594,804 1798,804 1869.55,875.54 U6.28@1869.55,975.67
  Bottom Layer w8: R36.1@971,781 972,782 1468,782 v1(1469,783)
C_SPI1_MISO: R48.1 U6.30 | length 1073
  Top Layer w8: v1(1526,832) 1547.03,853.03 1794.03,853.03 1830.17,889.17 U6.30@1830.17,975.67
  Bottom Layer w8: R48.1@971,689 1013,689 1055,731 1500.76,731 1526,756.24 v1(1526,832)
C_SPI1_MOSI: R45.1 U6.31 | length 1049.2
  Top Layer w8: v1(1490,858) 1491.42,858 1507.68,874.26 1779.75,874.26 1810.49,905 U6.31@1810.49,975.67
  Bottom Layer w8: R45.1@971,735 997,735 1015.06,753.06 1487,753.06 1500.76,766.82 1500.76,812.24 1490,823 v1(1490,858)
C_SPI1_SCK: R37.1 U6.29 | length 1036
  Top Layer w8: v1(1452.44,826) 1483.67,826 1509.67,800 1556,800 1585,829 1797,829 1849.86,881.86 U6.29@1849.86,975.67
  Bottom Layer w8: R37.1@971,827 1000,827 1023,804 1427.4,804 1449.4,826 v1(1452.44,826)
C_SWCLK: R34.2 S_SWD.1 U5.20 | length 519.5
  Top Layer w8: U5.20@698.55,684.13 735.3,684.13 754.74,664.68 755.99,664.68 759.67,661 v1(764,661) ; v1(827.16,558.16) 840.78,558.16 R34.2@894.62,612
  Bottom Layer w8: v1(764,661) 783,642 783,559 ; v1(827.16,558.16) 826.32,559 783,559 ; S_SWD.1@868.19,394 866,396.19 866,431 783,514 783,559
C_SWDATA: S_SWD.2 U5.19 | length 327.2
  Top Layer w8: U5.19@698.55,668.38 724.5,668.38 734,658.87 734,634.69 746,622.69 v1(746,622)
  Bottom Layer w8: v1(746,622) 746,514 789.44,470.56 S_SWD.2@789.44,394
C_UART1_RX: R50.1 U6.68 | length 449.3
  Top Layer w10: R50.1@931.69,566 1238,566 1249.44,577.44 U6.68@1376.28,577.44
C_UART1_TX: R38.1 U6.69 | length 460.2
  Top Layer w10: R38.1@931.69,520 972,520 989,537 1248,537 1268.75,557.75 U6.69@1376.28,557.75
DN: R19.2 R21.2 USB.A7 | length 138.9
  Top Layer w8: R19.2@1396,1198.69 R21.2@1444,1198.69 1444,1241 1439.47,1245.53 USB.A7@1439.47,1287.74
DP: R23.2 R27.2 USB.A6 | length 193.2
  Top Layer w8: R23.2@1300,1198.69 R27.2@1348,1198.69 1348,1223 1358,1233 1403,1233 1419.92,1249.92 USB.A6@1419.92,1287.74
FLASH_HOLD: R22.1 R25.1 U3.7 | length 134.6
  Top Layer w20: R25.1@211.62,931 R22.1@211.62,882 211.62,849.05 224,836.67 U3.7@224,801.49
FLASH_WP: R24.2 R26.2 U3.3 | length 144
  Top Layer w20: R24.2@251,386 R26.2@251,434 274,457 U3.3@274,520.51